# Allegro board 808bd16.brd
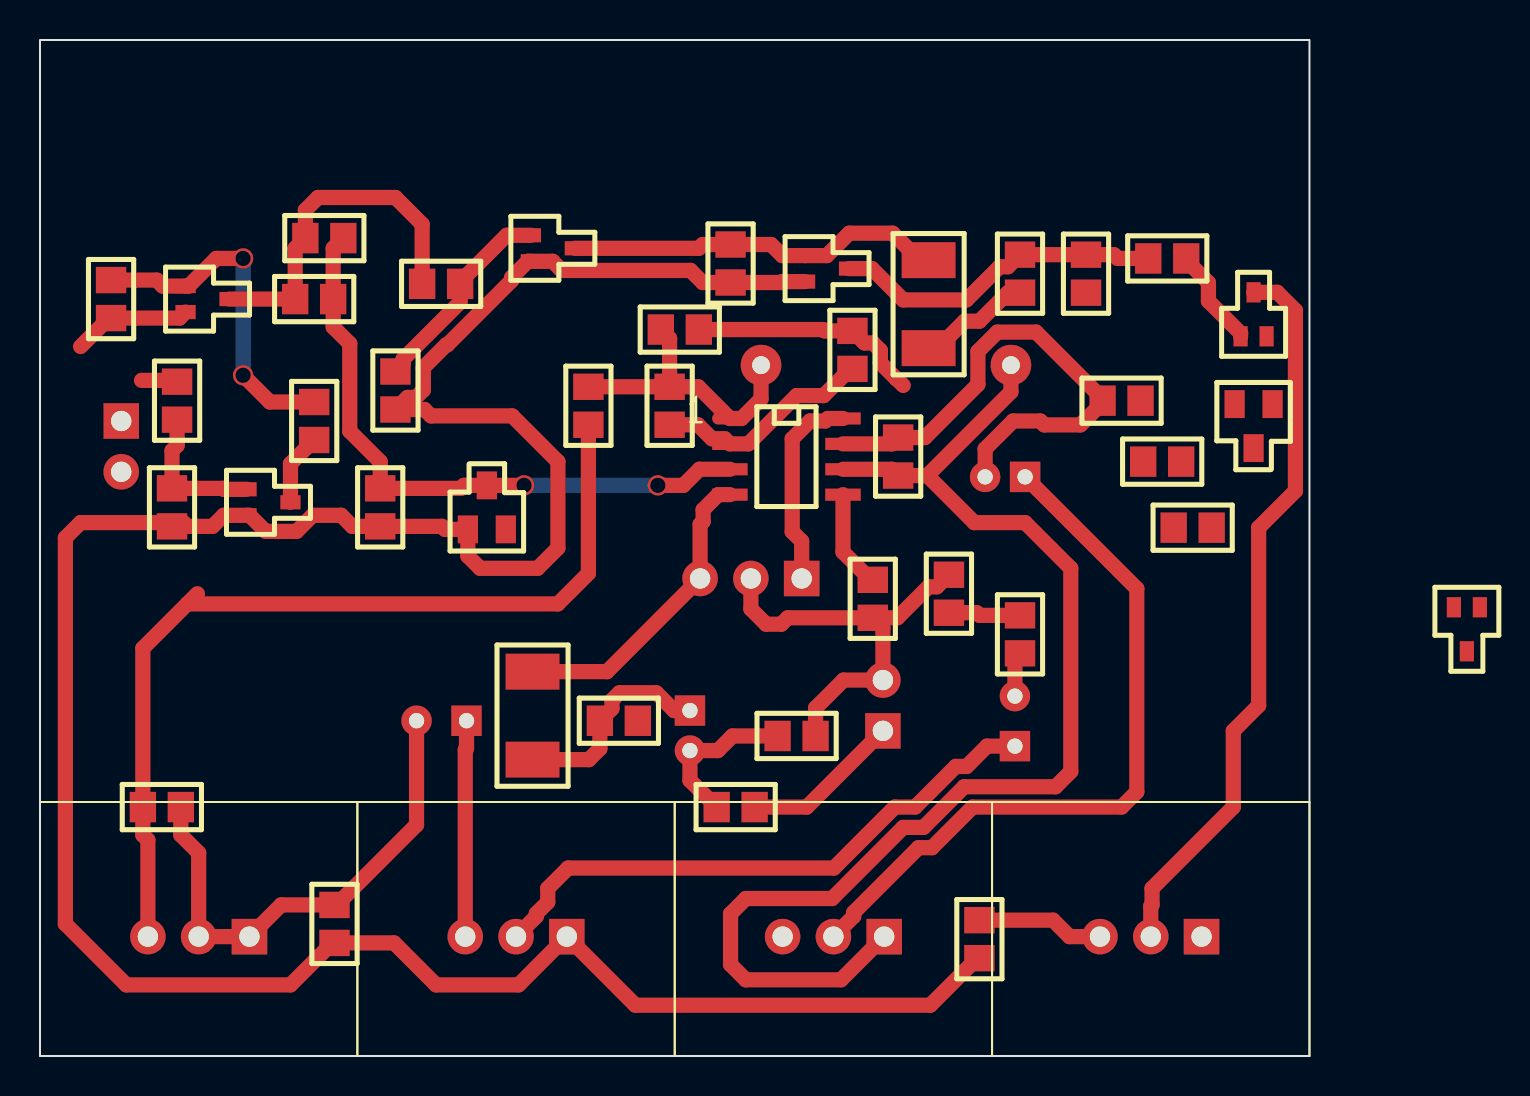
[diagram p0: board, top side]
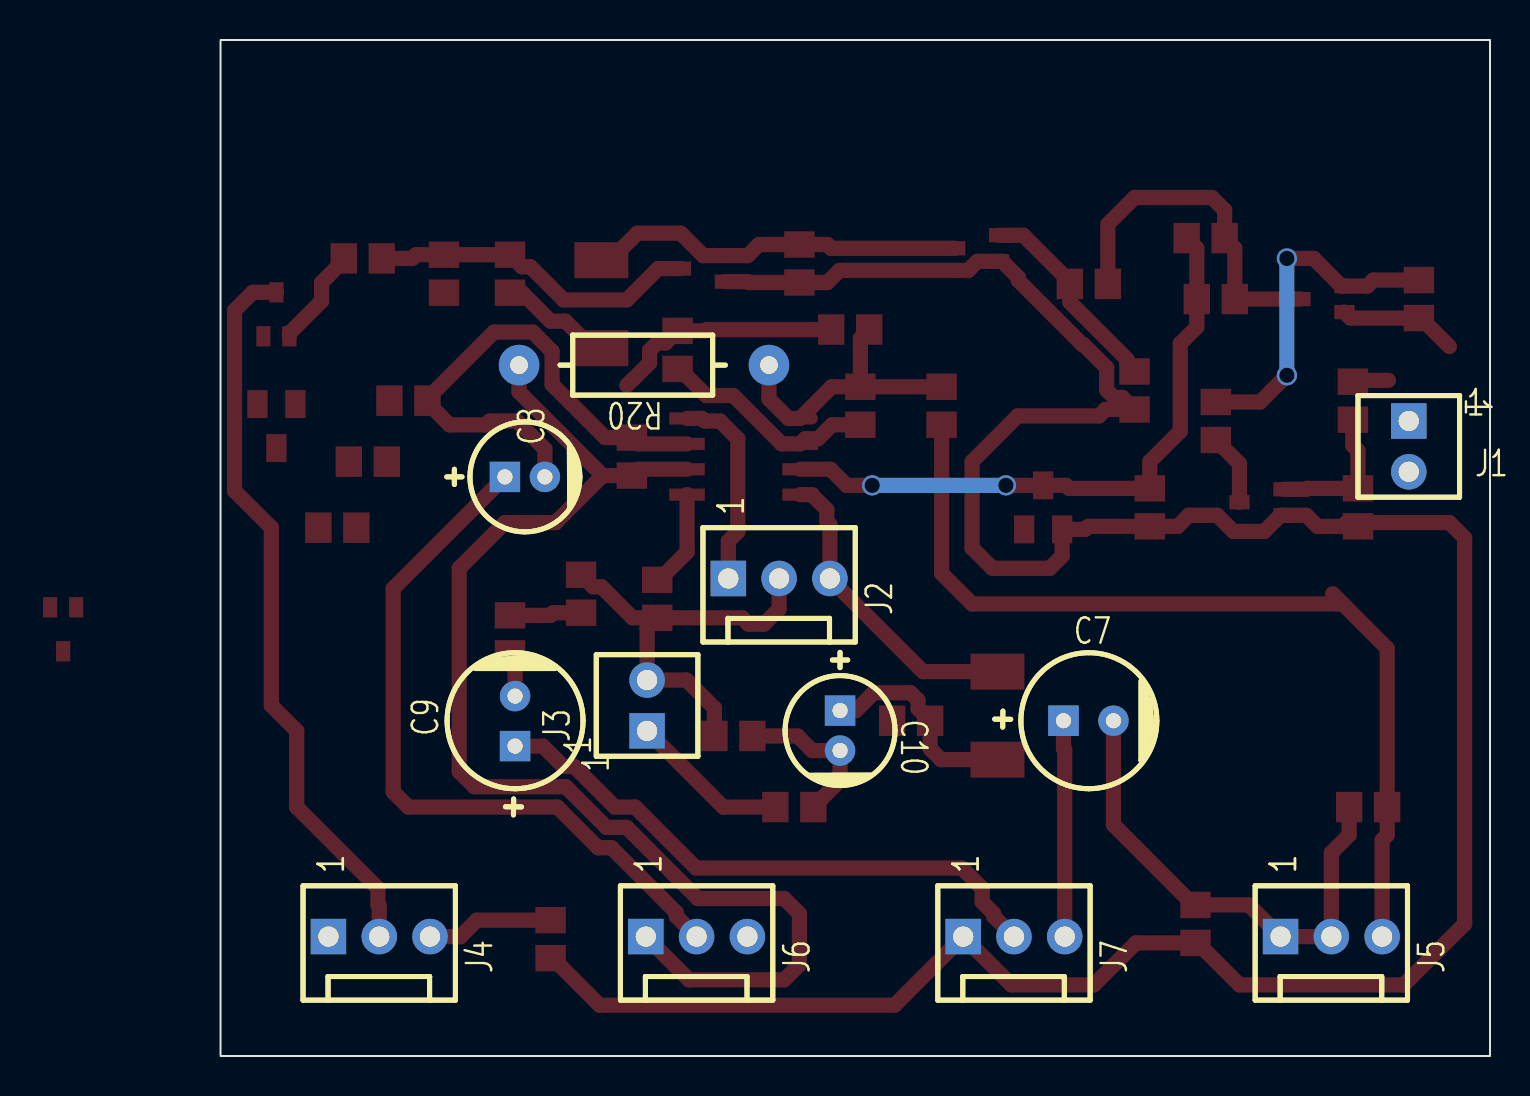
[diagram p1: board, bottom side, seen from below]

Outline 63.5 x 50.8 mm; copper layers: TOP, BOTTOM. Coordinates in mm from the lower left corner of the outline.
Outline path: rectangle 0,0 63.5,50.8

## Placement (name value [footprint] x y rotation side)
C1  0.015UF  [CAPC-0805_W]  14.22 40.89 0 top
C2  0.1UF  [CAPC-0805_W]  34.54 39.62 270 top
C3  0.033UF  [CAPC-0805_W]  52.32 39.12 270 top
C4  0.015UF  [CAPC-0805_W]  40.64 35.31 90 top
C5  0.015UF  [CAPC-0805_W]  32 36.32 180 top
C6  0.1UF  [CAPC-0805_W]  14.73 6.6 270 top
C7  47UF  [CAPE_2P5_6P3X11P5]  21.34 16.76 180 bottom
C8  33UF  [CAPE_2P0_5X11P5]  49.28 28.96 180 bottom
C9  47UF  [CAPE_2P5_6P3X11P5]  48.77 15.49 90 bottom
C10  1.0UF  [CAPE_2P0_5X11P5]  32.51 17.27 270 bottom
C11  220PF  [CAPC-0805_W]  28.96 16.76 0 top
D1  MMBD4148  [SOT-23_W]  22.35 27.43 90 top
D2  MMBD4148  [SOT-23_W]  60.71 31.5 270 top
J1  640452-2  [CONN-AMP-2PIN-100MIL-ST]  4.06 31.75 270 bottom
J2  640456-3  [CONN-AMP-3PIN-100MIL-ST]  38.1 23.88 180 bottom
J3  640452-2  [CONN-AMP-2PIN-100MIL-ST]  42.16 16.26 90 bottom
J4  641215-3  [CONN-AMP-3PIN-100MIL-ST]  58.1 5.97 180 bottom
J5  641215-3  [CONN-AMP-3PIN-100MIL-ST]  10.48 5.97 180 bottom
J6  641215-3  [CONN-AMP-3PIN-100MIL-ST]  42.23 5.97 180 bottom
J7  641215-3  [CONN-AMP-3PIN-100MIL-ST]  26.35 5.97 180 bottom
Q1  FJX945  [SOT-323_W]  11.43 27.69 0 top
Q2  FJX733  [SOT-323_W]  8.38 37.85 0 top
Q3  FJX945  [SOT-323_W]  25.65 40.39 0 top
Q4  FJX945  [SOT-323_W]  39.37 39.37 0 top
Q5  FJX945  [SOT-323_W]  60.71 37.08 90 top
Q6  FJX945  [SOT-323_W]  71.37 21.34 270 top
R1  22K  [RESC-0805_W]  6.86 32.77 90 top
R2  10K  [RESC-0805_W]  6.6 27.43 90 top
R3  4.7K  [RESC-0805_W]  3.56 37.85 270 top
R4  10K  [RESC-0805_W]  13.72 31.75 90 top
R5  100K  [RESC-0805_W]  13.72 37.85 0 top
R6  8.2K  [RESC-0805_W]  20.07 38.61 0 top
R7  2.7K  [RESC-0805_W]  17.78 33.27 90 top
R8  4.7K  [RESC-0805_W]  17.02 27.43 90 top
R9  1.0M  [RESC-2010_W]  44.45 37.59 270 top
R10  22K  [RESC-0805_W]  49.02 39.12 270 top
R11  100K  [RESC-0805_W]  56.39 39.88 0 top
R12  1.0M  [RESC-0805_W]  56.13 29.72 0 top
R13  6.8K  [RESC-0805_W]  57.66 26.42 180 top
R14  1.0M  [RESC-0805_W]  31.5 32.51 270 top
R16  22K  [RESC-0805_W]  46.99 5.84 90 top
R17  470K  [RESC-0805_W]  54.1 32.77 180 top
R18  10K  [RESC-0805_W]  6.1 12.45 180 top
R19  220  [RESC-0805_W]  27.43 32.51 90 top
R20  47K  [RES_12P5_3D_0P9H]  36.07 34.54 0 bottom
R22  22K  [RESC-0805_W]  41.66 22.86 90 top
R25  47K  [RESC-0805_W]  42.93 29.97 90 top
R26  82K  [RESC-0805_W]  49.02 21.08 90 top
R27  100K  [RESC-0805_W]  45.47 23.11 270 top
R28  100K  [RESC-0805_W]  37.85 16 180 top
R29  6.8K  [RESC-2010_W]  24.64 17.02 270 top
R30  1.0K  [RESC-0805_W]  34.8 12.45 0 top
U1  LM258D  [SO8]  37.34 29.97 0 top

## Library data of the parts
C1 C4 C5 = C_SMT_X7R_0805: alternate symbols: (CAPC-0805_W_PADS,CAPC-0805_HD); part number: C_SMT_X7R_0805-10000435,0.015UF,X7R,25V,5%,CAPC-0805_W
C2 C6 = C_SMT_X7R_0805: alternate symbols: (CAPC-0805_W_PADS,CAPC-0805_HD); part number: C_SMT_X7R_0805-10000445,0.1UF,X7R,25V,5%,CAPC-0805_W
C3 = C_SMT_X7R_0805: alternate symbols: (CAPC-0805_W_PADS,CAPC-0805_HD); part number: C_SMT_X7R_0805-10000439,0.033UF,X7R,25V,5%,CAPC-0805_W
C7 C9 = C_TH_LYTIC85_2P5_6P3X11P5: alternate symbols: (CAPE_5P0_6P3X11P5); part number: C_TH_LYTIC85_2P5_6P3X11P5-10002982,47UF,RADIAL,50VDC,20%,85C,CAPE_2P5_6P3X11P5
C8 = C_TH_LYTIC85_2P0_5X11P5: alternate symbols: (CAPE_5P0_5X11P5,CAPER_5X11_2_PADS,CAPE_2P5_5X11,CAPEL_2P0_5X11P5,CAPER_2P0_5X11P5); part number: C_TH_LYTIC85_2P0_5X11P5-10002898,33UF,RADIAL,6.3VDC,20%,85C,CAPE_2P0_5X11P5
C10 = C_TH_LYTIC85_2P0_5X11P5: alternate symbols: (CAPE_5P0_5X11P5,CAPER_5X11_2_PADS,CAPE_2P5_5X11,CAPEL_2P0_5X11P5,CAPER_2P0_5X11P5); part number: C_TH_LYTIC85_2P0_5X11P5-10002975,1.0UF,RADIAL,50VDC,20%,85C,CAPE_2P0_5X11P5
C11 = C_SMT_X7R_0805: alternate symbols: (CAPC-0805_W_PADS,CAPC-0805_HD); part number: C_SMT_X7R_0805-10000726,220PF,X7R,50V,20%,CAPC-0805_W
D1 D2 = D_SMT_SIGNAL_1A3C_SOT-23: alternate symbols: (SOT-23_IPCN,SOT-23W,SOT-23_HD); part number: D_SMT_SIGNAL_1A3C_SOT-23-10004947,MMBD4148,SIGNAL-3PIN,75V,200MA,SOT-23_W
J1 J3 = J_2_ST_AMP_640452: part number: J_2_ST_AMP_640452-10017071,640452-2,CONN-AMP-2PIN-100MIL-ST
J2 = J_3_ST_AMP_640456: part number: J_3_ST_AMP_640456-10017170,640456-3,CONN-AMP-3PIN-100MIL-ST
J4-J7 = J_3_ST_AMP_641215: part number: J_3_ST_AMP_641215-10017175,641215-3,CONN-AMP-3PIN-100MIL-ST
Q1 Q3-Q6 = Q_NPN_SIGNAL_BEC_SOT-323: alternate symbols: (SOT-323_IPCN,SOT-323_DELTA); part number: Q_NPN_SIGNAL_BEC_SOT-323-10005453,FJX945,NPN SIGNAL,50V,0.15A,SOT-323_W
Q2 = Q_PNP_SIGNAL_BEC_SOT-323: alternate symbols: (SOT-323_IPCN,SOT-323_DELTA); part number: Q_PNP_SIGNAL_BEC_SOT-323-10005646,FJX733,PNP SIGNAL,50V,0.15A,SOT-323_W
R1 R10 R16 R22 = R_SMT_0805: alternate symbols: (RESC-0805_W_PADS,RESC-0805_HD); part number: R_SMT_0805-10006498,22K,TF-SMT0805,1/8W,5%,RESC-0805_W
R2 R4 R18 = R_SMT_0805: alternate symbols: (RESC-0805_W_PADS,RESC-0805_HD); part number: R_SMT_0805-10006490,10K,TF-SMT0805,1/8W,5%,RESC-0805_W
R3 R8 = R_SMT_0805: alternate symbols: (RESC-0805_W_PADS,RESC-0805_HD); part number: R_SMT_0805-10006482,4.7K,TF-SMT0805,1/8W,5%,RESC-0805_W
R5 R11 R27 R28 = R_SMT_0805: alternate symbols: (RESC-0805_W_PADS,RESC-0805_HD); part number: R_SMT_0805-10006514,100K,TF-SMT0805,1/8W,5%,RESC-0805_W
R6 = R_SMT_0805: alternate symbols: (RESC-0805_W_PADS,RESC-0805_HD); part number: R_SMT_0805-10006488,8.2K,TF-SMT0805,1/8W,5%,RESC-0805_W
R7 = R_SMT_0805: alternate symbols: (RESC-0805_W_PADS,RESC-0805_HD); part number: R_SMT_0805-10006476,2.7K,TF-SMT0805,1/8W,5%,RESC-0805_W
R9 = R_SMT_2010: part number: R_SMT_2010-10006228,1.0M,TF-SMT2010,3/4W,5%,RESC-2010_W
R12 R14 = R_SMT_0805: alternate symbols: (RESC-0805_W_PADS,RESC-0805_HD); part number: R_SMT_0805-10006538,1.0M,TF-SMT0805,1/8W,5%,RESC-0805_W
R13 = R_SMT_0805: alternate symbols: (RESC-0805_W_PADS,RESC-0805_HD); part number: R_SMT_0805-10006486,6.8K,TF-SMT0805,1/8W,5%,RESC-0805_W
R17 = R_SMT_0805: alternate symbols: (RESC-0805_W_PADS,RESC-0805_HD); part number: R_SMT_0805-10006530,470K,TF-SMT0805,1/8W,5%,RESC-0805_W
R19 = R_SMT_0805: alternate symbols: (RESC-0805_W_PADS,RESC-0805_HD); part number: R_SMT_0805-10006450,220,TF-SMT0805,1/8W,5%,RESC-0805_W
R20 = R_TH_CARBON_1_4W: alternate symbols: (RES_15_3D_0P9H,RES_5_3D_0P9H_V1,RES_5_3D_0P9H_V2,RES_10_3D_0P9H); part number: R_TH_CARBON_1_4W-10013804,47K,CARBON,1/4W,5%,RES_12P5_3D_0P9H
R25 = R_SMT_0805: alternate symbols: (RESC-0805_W_PADS,RESC-0805_HD); part number: R_SMT_0805-10006506,47K,TF-SMT0805,1/8W,5%,RESC-0805_W
R26 = R_SMT_0805: alternate symbols: (RESC-0805_W_PADS,RESC-0805_HD); part number: R_SMT_0805-10006512,82K,TF-SMT0805,1/8W,5%,RESC-0805_W
R29 = R_SMT_2010: part number: R_SMT_2010-10006176,6.8K,TF-SMT2010,3/4W,5%,RESC-2010_W
R30 = R_SMT_0805: alternate symbols: (RESC-0805_W_PADS,RESC-0805_HD); part number: R_SMT_0805-10006466,1.0K,TF-SMT0805,1/8W,5%,RESC-0805_W
U1 = U_LM258D_SO8: alternate symbols: (SO8_WAVE,SO8_WAVE2); part number: U_LM258D_SO8-10019370,LM258D,SO8

## Footprints (pads in the part's own frame, mm; a bottom-side part is the same pattern mirrored in y, then rotated)
CAPC-0805_W
  rect 1.321x1.524 smd: 1(-0.95,0) 2(0.95,0)
CAPE_2P0_5X11P5
  round 1.524 hole 0.762: N(2,0)
  rect 1.524x1.524 hole 0.762: P(0,0)
CAPE_2P5_6P3X11P5
  round 1.524 hole 0.762: N(2.5,0)
  rect 1.524x1.524 hole 0.762: P(0,0)
CONN-AMP-2PIN-100MIL-ST
  rect 1.778x1.778 hole 1.016: 1(0,0)
  round 1.778 hole 1.016: 2(2.54,0)
CONN-AMP-3PIN-100MIL-ST
  rect 1.778x1.778 hole 1.016: 1(0,0)
  round 1.778 hole 1.016: 2(2.54,0) 3(5.08,0)
RES_12P5_3D_0P9H
  round 2.032 hole 0.889: 1(0,0) 2(12.5,0)
RESC-0805_W
  rect 1.321x1.524 smd: 1(-0.95,0) 2(0.95,0)
RESC-2010_W
  rect 1.8x2.7 smd: 1(-2.2,0) 2(2.2,0)
SO8
  oval 1.778x0.61 smd: 1(-2.829,1.905)
  rect 1.778x0.61 smd: 2(-2.829,0.635) 3(-2.829,-0.635) 4(-2.829,-1.905) 5(2.829,-1.905) 6(2.829,-0.635) 7(2.829,0.635) 8(2.829,1.905)
SOT-23_W
  rect 1.397x1.016 smd: 1(-1.1,0.95) 2(-1.1,-0.95) 3(1.1,0)
SOT-323_W
  rect 1.016x0.711 smd: 1(-1.1,0.65) 2(-1.1,-0.65) 3(1.1,0)

## Nets
+15V: J2.1 Q6.3(C) R9.2 R10.2 U1.8
-15V: J2.3 R29.1 U1.4
GND_SIGNAL: C2.2 C6.2 C11.2 D1.1(A) D2.1(A) J2.2 J3.2 J7.1 Q1.2(E) Q3.2(E) Q4.2(E) Q5.2(E) R2.1 R7.1 R8.1 R16.1 R22.1 R27.1 R28.1
UNNAMED_1_CSMT_I19_1: C1.1 Q2.3(C) R5.1 R6.1
UNNAMED_1_CSMT_I19_2: C1.2 D1.3(C) R5.2 R8.2 U1.3
UNNAMED_1_CSMT_I24_1: C2.1 Q3.3(C) Q4.1(B) R9.1
UNNAMED_1_CSMT_I30_1: C3.1 Q4.3(C) R10.1 R11.1
UNNAMED_1_CSMT_I30_2: C3.2 D2.3(C) R12.2
UNNAMED_1_CSMT_I33_1: C4.1 R14.2 U1.2
UNNAMED_1_CSMT_I33_2: C4.2 C5.1 R12.1 R13.2 R17.1
UNNAMED_1_CSMT_I34_2: C5.2 R14.1 R19.2 R20.1 U1.1
UNNAMED_1_CSMT_I35_1: C10.P(1) C11.1 Q6.2(E) R29.2
UNNAMED_1_CSMT_I47_1: C6.1 C7.N(2) J5.1 J5.2 R18.1
UNNAMED_1_CTHLYTIC85_I56_1: C8.P(1) J6.2
UNNAMED_1_CTHLYTIC85_I57_1: C7.P(1) J7.3
UNNAMED_1_CTHLYTIC85_I58_2: C10.N(2) R28.2 R30.1
UNNAMED_1_CTHLYTIC85_I61_1: C9.P(1) J7.2
UNNAMED_1_CTHLYTIC85_I61_2: C9.N(2) R26.1
UNNAMED_1_J2ST_I70_1: J3.1 R30.2
UNNAMED_1_J2ST_I71_2: J1.2 R1.2
UNNAMED_1_J3ST_I76_1: J6.1 R20.2 R25.1 U1.6
UNNAMED_1_QNPNSIGNAL_I15_B: Q1.1(B) R1.1 R2.2
UNNAMED_1_QNPNSIGNAL_I15_C: Q1.3(C) R4.1
UNNAMED_1_QNPNSIGNAL_I18_B: Q3.1(B) R6.2 R7.2
UNNAMED_1_QNPNSIGNAL_I38_B: Q5.1(B) R11.2
UNNAMED_1_QNPNSIGNAL_I38_C: J4.2 Q5.3(C) R13.1
UNNAMED_1_QNPNSIGNAL_I62_B: Q6.1(B) R26.2 R27.2
UNNAMED_1_QPNPSIGNAL_I16_B: Q2.1(B) R3.1 R4.2
UNNAMED_1_QPNPSIGNAL_I16_E: J1.1 Q2.2(E) R3.2
UNNAMED_1_RSMT_I43_2: J4.3 R16.2
UNNAMED_1_RSMT_I45_1: J5.3 R18.2 R19.1
UNNAMED_1_RSMT_I52_2: C8.N(2) R17.2 R25.2 U1.7
UNNAMED_1_RSMT_I53_2: R22.2 U1.5

Pads without a net: D1 2; D2 2; J4 1; J6 3

## Via types
v1: diameter 1.016, hole 0.762, TOP to BOTTOM, 4 vias

## Routing (per net, layer and track width the routed paths; a pad name or vN(x,y) marks a point on that pad's centre or on a via; arc(x,y) is an arc through that point)
+15V: length 15.9
  TOP w0.762: U1.8 39.41,31.88 39.28,31.75 38.52,31.75 37.63,30.86 37.63,26.21 38.1,25.74 J2.1 ; R10.2 48.42,38.17 46.99,36.74 46.25,36.74 44.9,35.39 R9.2
-15V: length 15.5
  TOP w0.762: U1.4 33.93,28.07 33.17,27.31 33.17,26.73 33.02,26.58 J2.3 28.36,19.22 R29.1
GND_SIGNAL: length 160.1
  TOP w0.762: R16.1 46.89,4.89 44.54,2.54 29.78,2.54 J7.1 23.94,3.56 19.81,3.56 17.71,5.65 C6.2 14.63,5.65 12.53,3.56 4.32,3.56 1.27,6.6 1.27,25.91 2.03,26.67 7.18,26.67 7.37,26.48 ; Q4.2 37.13,38.72 37.08,38.67 C2.2 33.15,38.67 32.54,39.28 26.1,39.28 25.64,39.74 Q3.2 24.4,39.74 23.6,38.93 23.6,38.78 20.38,35.56 20.32,35.56 19.18,34.42 19.18,33.3 18.81,32.93 18.38,32.93 R7.1 19.24,32.32 19.56,32 23.62,32 25.91,29.72 25.91,25.4 24.89,24.38 22.02,24.38 21.4,25 D1.1 20.26,26.33 20.11,26.48 R8.1 15.62,26.48 15.07,27.04 13.64,27.04 12.84,26.23 11.29,26.23 10.48,27.04 Q1.2 9.19,27.04 8.63,26.48 7.37,26.48 ; R28.1 38.8,17.4 40.19,18.8 J3.2 42.16,21.4 R22.1 ; 7.37,26.48 R2.1 ; R22.1 42.89,21.91 44.44,23.46 44.86,23.46 R27.1 ; R22.1 37.4,21.91 37.08,21.59 36.32,21.59 35.56,22.35 J2.2
UNNAMED_1_CSMT_I19_1: length 17.6
  TOP w0.762: R6.1 19.12,41.59 17.78,42.93 13.91,42.93 13.27,42.29 C1.1 12.77,40.39 R5.1 Q2.3
UNNAMED_1_CSMT_I19_2: length 31.6
  TOP w0.762: C1.2 14.67,40.39 R5.2 14.67,36.45 15.49,35.62 15.49,31.24 17.02,29.72 R8.2 21.06,28.38 21.21,28.53 D1.3 v1(24.21,28.53) ; U1.3 32.99,29.34 32.18,28.53 v1(30.9,28.53)
  BOTTOM w0.762: v1(24.21,28.53) v1(30.9,28.53)
UNNAMED_1_CSMT_I24_1: length 19
  TOP w0.762: R9.1 44,39.79 42.65,41.14 40.48,41.14 39.36,40.02 Q4.1 37.13,40.02 36.57,40.57 C2.1 33.15,40.57 32.96,40.39 Q3.3
UNNAMED_1_CSMT_I30_1: length 16.6
  TOP w0.762: Q4.3 41.61,39.37 43.18,37.8 46.34,37.8 48,39.46 48.42,39.46 R10.1 C3.1 53.72,40.07 53.91,39.88 R11.1
UNNAMED_1_CSMT_I33_1: length 11.1
  TOP w0.762: C4.1 40.54,34.36 39.2,33.02 37.85,33.02 35.43,30.61 U1.2 34.26,30.86 33.61,30.86 32.91,31.56 R14.2
UNNAMED_1_CSMT_I33_2: length 11.7
  TOP w0.762: 43.18,33.53 42.85,33.86 42.84,33.86 42.04,34.66 42.04,35.28 41.67,35.65 41.24,35.65 C4.2 39.24,36.26 39.18,36.32 C5.1
UNNAMED_1_CSMT_I34_2: length 14.4
  TOP w0.762: R14.1 31.5,35.88 C5.2 ; R14.1 R19.2 ; R14.1 32.92,33.46 U1.1 35.09,31.88 36.07,32.85 R20.1
UNNAMED_1_CSMT_I35_1: length 10.7
  TOP w0.762: C10.P 31.72,17.27 30.83,18.16 28.98,18.16 28.61,17.79 28.61,17.37 C11.1 28.01,15.37 27.46,14.82 R29.2
UNNAMED_1_CSMT_I47_1: length 25.3
  TOP w0.762: C7.N 18.84,11.56 14.83,7.55 C6.1 12.06,7.55 J5.1 J5.2 7.94,10.16 7.05,11.05 R18.1
UNNAMED_1_CTHLYTIC85_I56_1: length 36.3
  TOP w0.762: C8.P 54.86,23.37 54.86,13.21 54.1,12.45 46.65,12.45 44.62,10.41 43.94,10.41 40.7,7.18 40.7,6.99 J6.2
UNNAMED_1_CTHLYTIC85_I57_1: length 10.8
  TOP w0.762: C7.P 21.34,15.37 21.27,15.3 J7.3
UNNAMED_1_CTHLYTIC85_I58_2: length 8.1
  TOP w0.762: R30.1 32.51,13.78 C10.N 33.91,15.27 34.64,16 R28.2
UNNAMED_1_CTHLYTIC85_I61_1: length 29.4
  TOP w0.762: C9.P 47.37,15.49 46.36,14.48 45.81,14.48 43.78,12.45 42.76,12.45 39.71,9.4 26.42,9.4 25.4,8.38 25.4,7.69 24.83,7.12 24.83,6.99 J7.2
UNNAMED_1_CTHLYTIC85_I61_2: length 2.2
  TOP w0.762: C9.N 48.77,19.88 R26.1
UNNAMED_1_J2ST_I70_1: length 8
  TOP w0.762: J3.1 38.35,12.45 R30.2
UNNAMED_1_J2ST_I71_2: length 1.8
  TOP w0.762: 5.08,33.78 6.79,33.78 R1.2
UNNAMED_1_J3ST_I76_1: length 62.3
  TOP w0.762: 44.38,29.02 48.57,33.21 R20.2 ; 44.38,29.02 46.74,26.67 49.28,26.67 51.56,24.38 51.56,14.22 50.8,13.46 46.23,13.46 44.2,11.43 43.18,11.43 39.62,7.87 35.31,7.87 34.54,7.11 34.54,4.57 35.31,3.81 40.07,3.81 J6.1 ; 44.38,29.02 R25.1 42.61,29.34 U1.6
UNNAMED_1_QNPNSIGNAL_I15_B: length 7.3
  TOP w0.762: R1.1 6.86,30.52 6.6,30.27 R2.2 9.14,28.38 9.19,28.34 Q1.1
UNNAMED_1_QNPNSIGNAL_I15_C: length 3.6
  TOP w0.762: Q1.3 12.53,29.61 R4.1
UNNAMED_1_QNPNSIGNAL_I18_B: length 10.3
  TOP w0.762: R7.2 18.16,34.6 18.16,34.84 21.02,37.69 R6.2 21.02,38.71 23.34,41.04 Q3.1
UNNAMED_1_QNPNSIGNAL_I38_B: length 5
  TOP w0.762: Q5.1 60.06,36.14 58.45,37.75 58.45,38.67 57.34,39.78 R11.2
UNNAMED_1_QNPNSIGNAL_I38_C: length 36.8
  TOP w0.762: Q5.3 61.89,38.18 62.8,37.28 62.8,28.26 60.96,26.42 60.96,17.53 59.69,16.26 59.69,12.45 55.63,8.38 55.63,7.56 55.56,7.49 J4.2
UNNAMED_1_QNPNSIGNAL_I62_B: length 3.6
  TOP w0.762: R27.2 46.86,22.16 47,22.03 R26.2
UNNAMED_1_QPNPSIGNAL_I16_B: length 17.3
  TOP w0.762: v1(10.16,34.04) 11.5,32.7 R4.2 ; v1(10.16,39.88) 8.82,39.88 7.43,38.5 Q2.1 6.14,38.5 5.84,38.8 R3.1
  BOTTOM w0.762: v1(10.16,34.04) v1(10.16,39.88)
UNNAMED_1_QPNPSIGNAL_I16_E: length 6
  TOP w0.762: 2.03,35.47 3.45,36.9 R3.2 6.98,36.9 Q2.2
UNNAMED_1_RSMT_I43_2: length 6.4
  TOP w0.762: J4.3 51.5,5.97 50.68,6.79 R16.2
UNNAMED_1_RSMT_I45_1: length 46.5
  TOP w0.762: R19.1 27.43,24.13 25.91,22.61 7.37,22.61 ; 7.37,22.61 5.15,20.39 R18.2 5.15,11.05 5.4,10.8 J5.3 ; 7.37,22.61 7.87,23.11
UNNAMED_1_RSMT_I52_2: length 26.6
  TOP w0.762: U1.7 42.61,30.61 R25.2 44.26,30.92 46.92,33.58 46.92,35.23 47.88,36.19 49.82,36.19 53.15,32.87 R17.2 53.15,32.66 52.04,31.55 50.23,31.55 50.04,31.75 48.67,31.75 47.28,30.35 C8.N 47.02,29.21
UNNAMED_1_RSMT_I53_2: length 4.9
  TOP w0.762: U1.5 40.17,25.2 41.55,23.81 R22.2
